# Altium PCB STM32F3_DRV8323RS.PcbDoc (part 1 of 2)
Units mil, origin at the board's own origin, x right, y up, seen from the top; angles counter-clockwise.
Board outline 1929.13 x 1057.48 mil, 4 copper layers (Top Layer, Mid-Layer 1, Mid-Layer 2, Bottom Layer); 100 components, 83 nets, 400 pads, 171 vias.
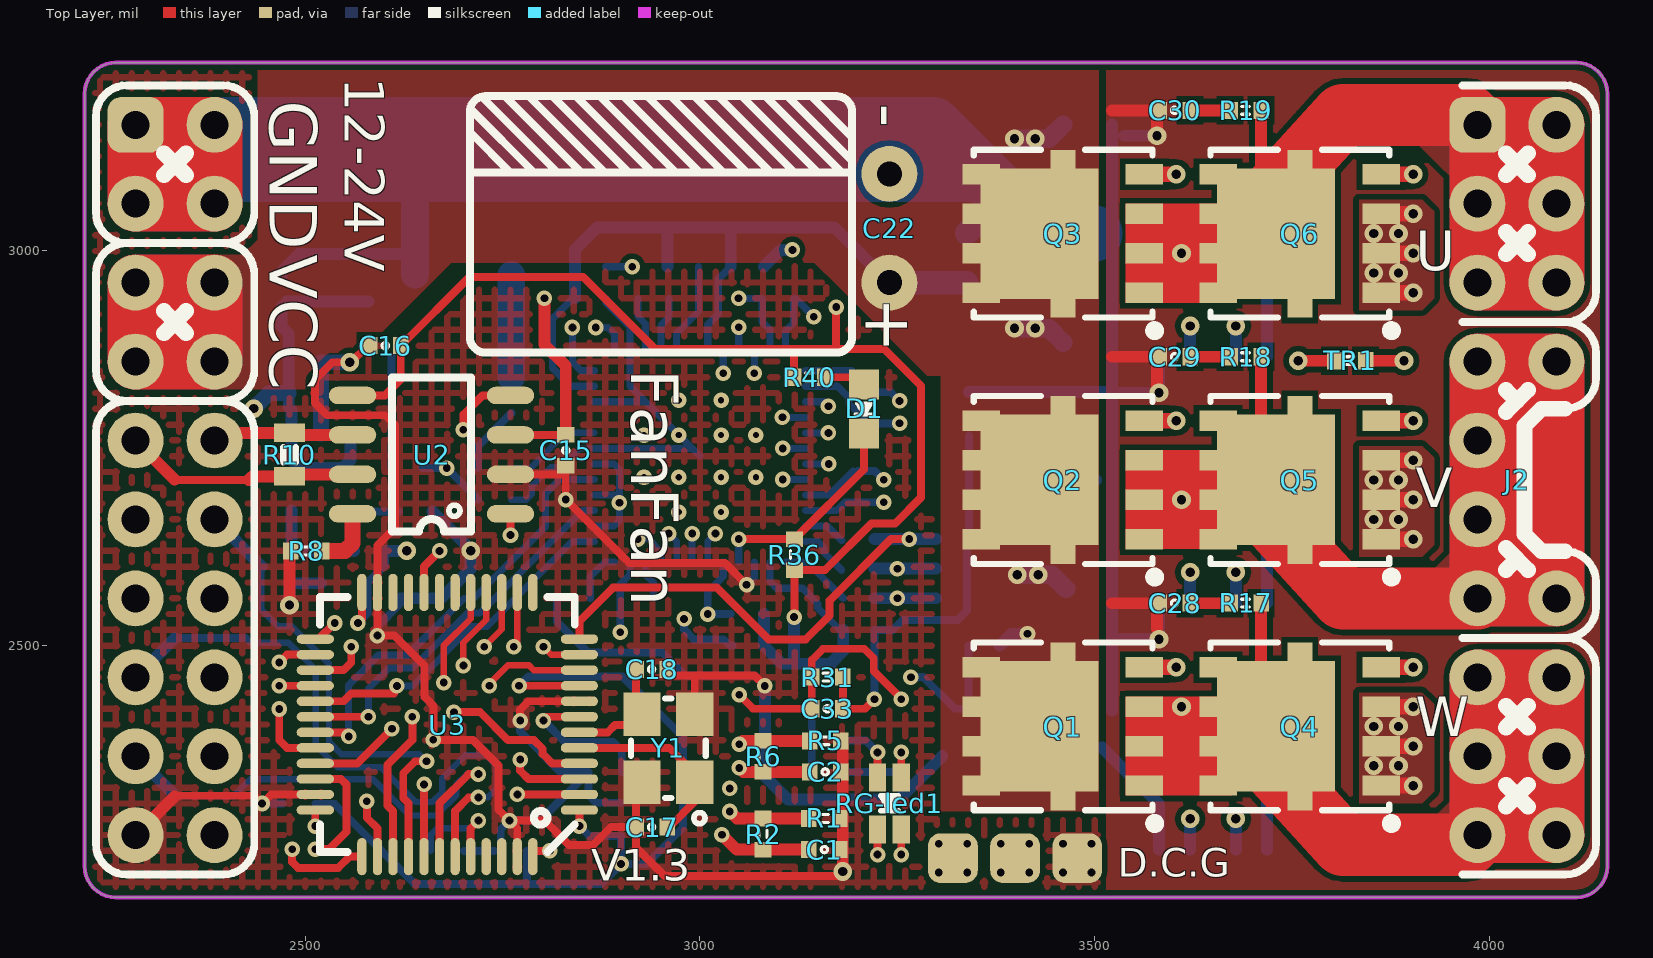
[diagram p0: Top Layer view]
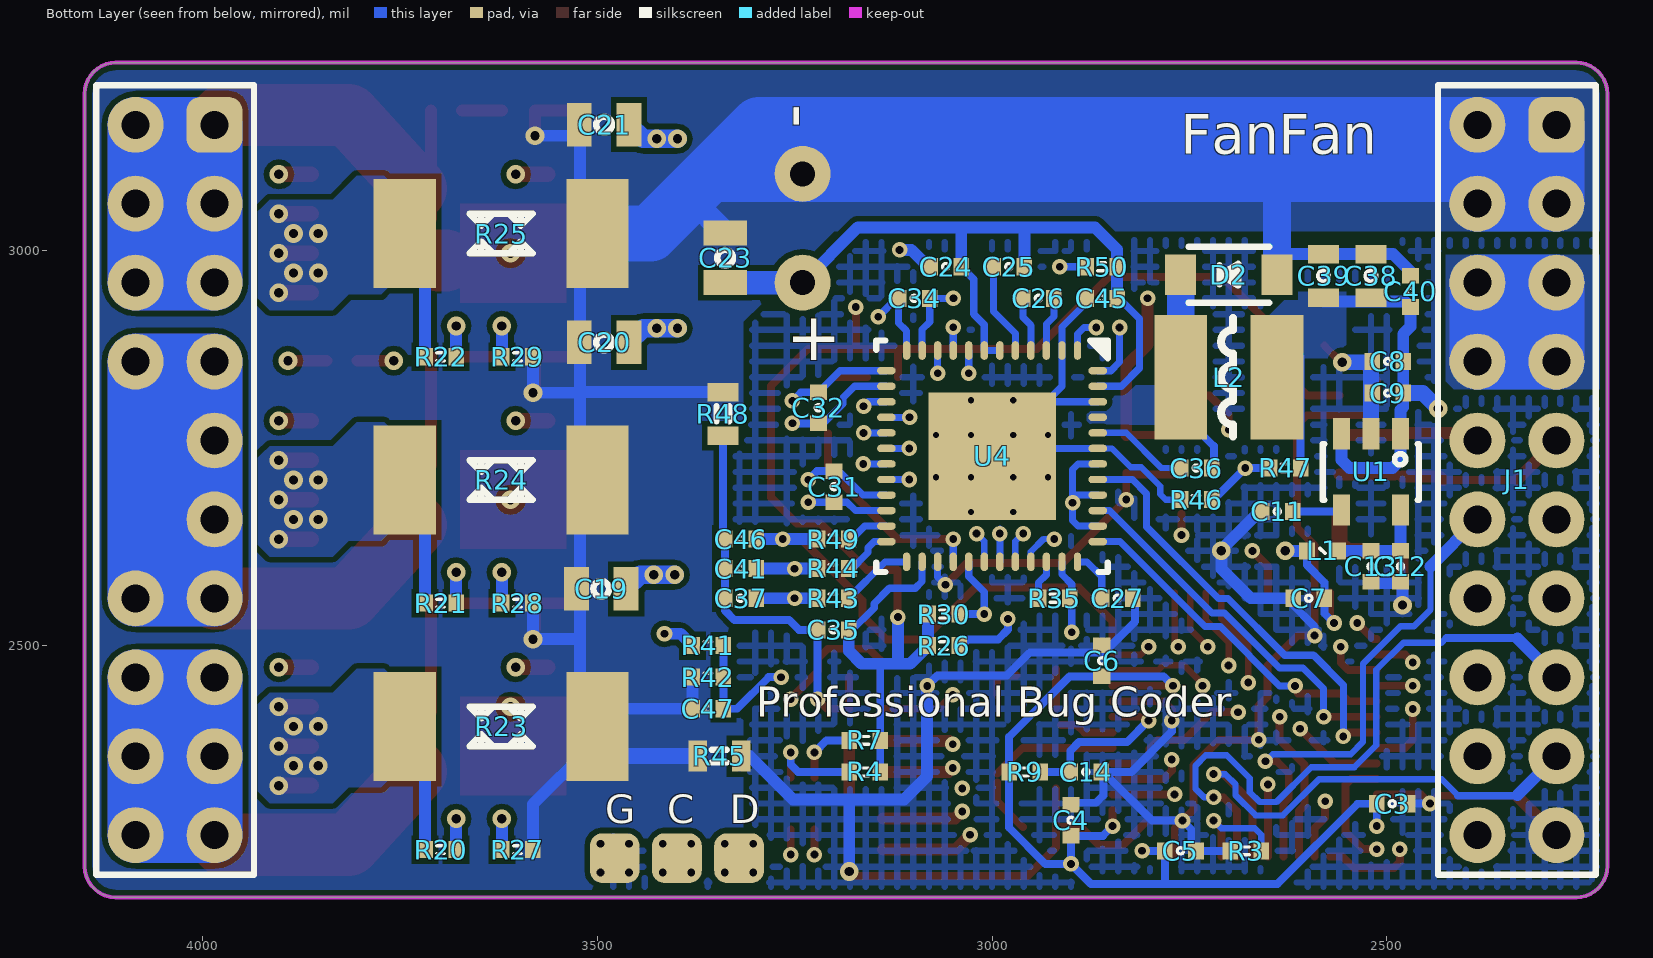
[diagram p1: Bottom Layer view, seen from below]
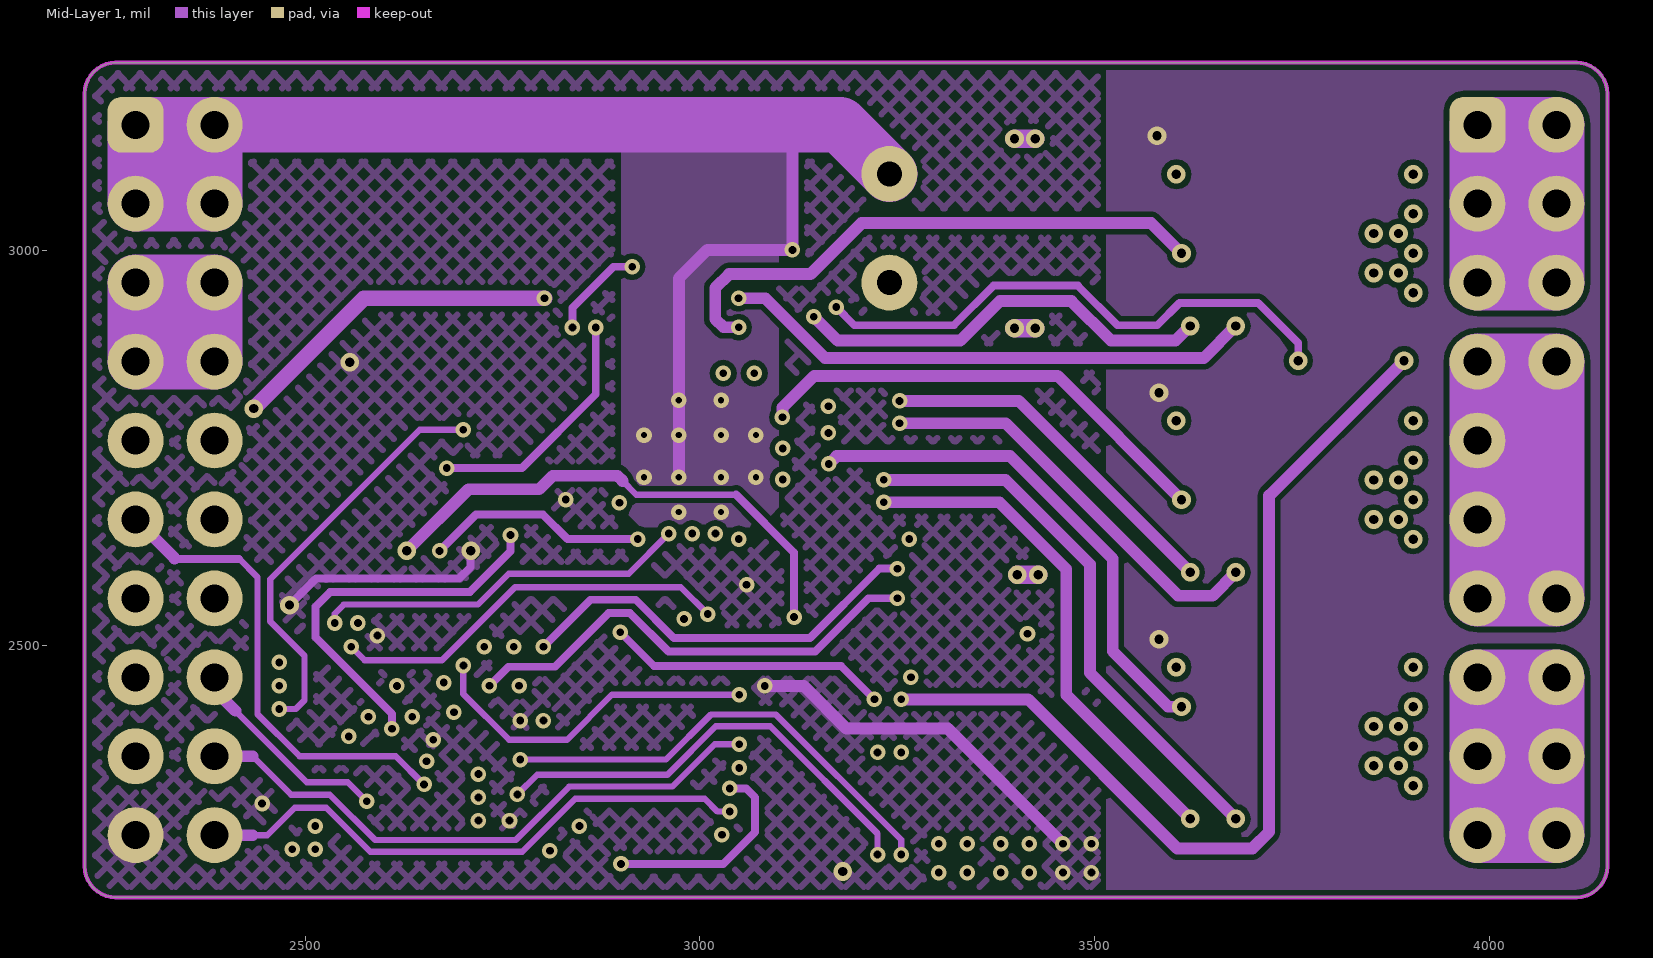
[diagram p2: Mid-Layer 1]
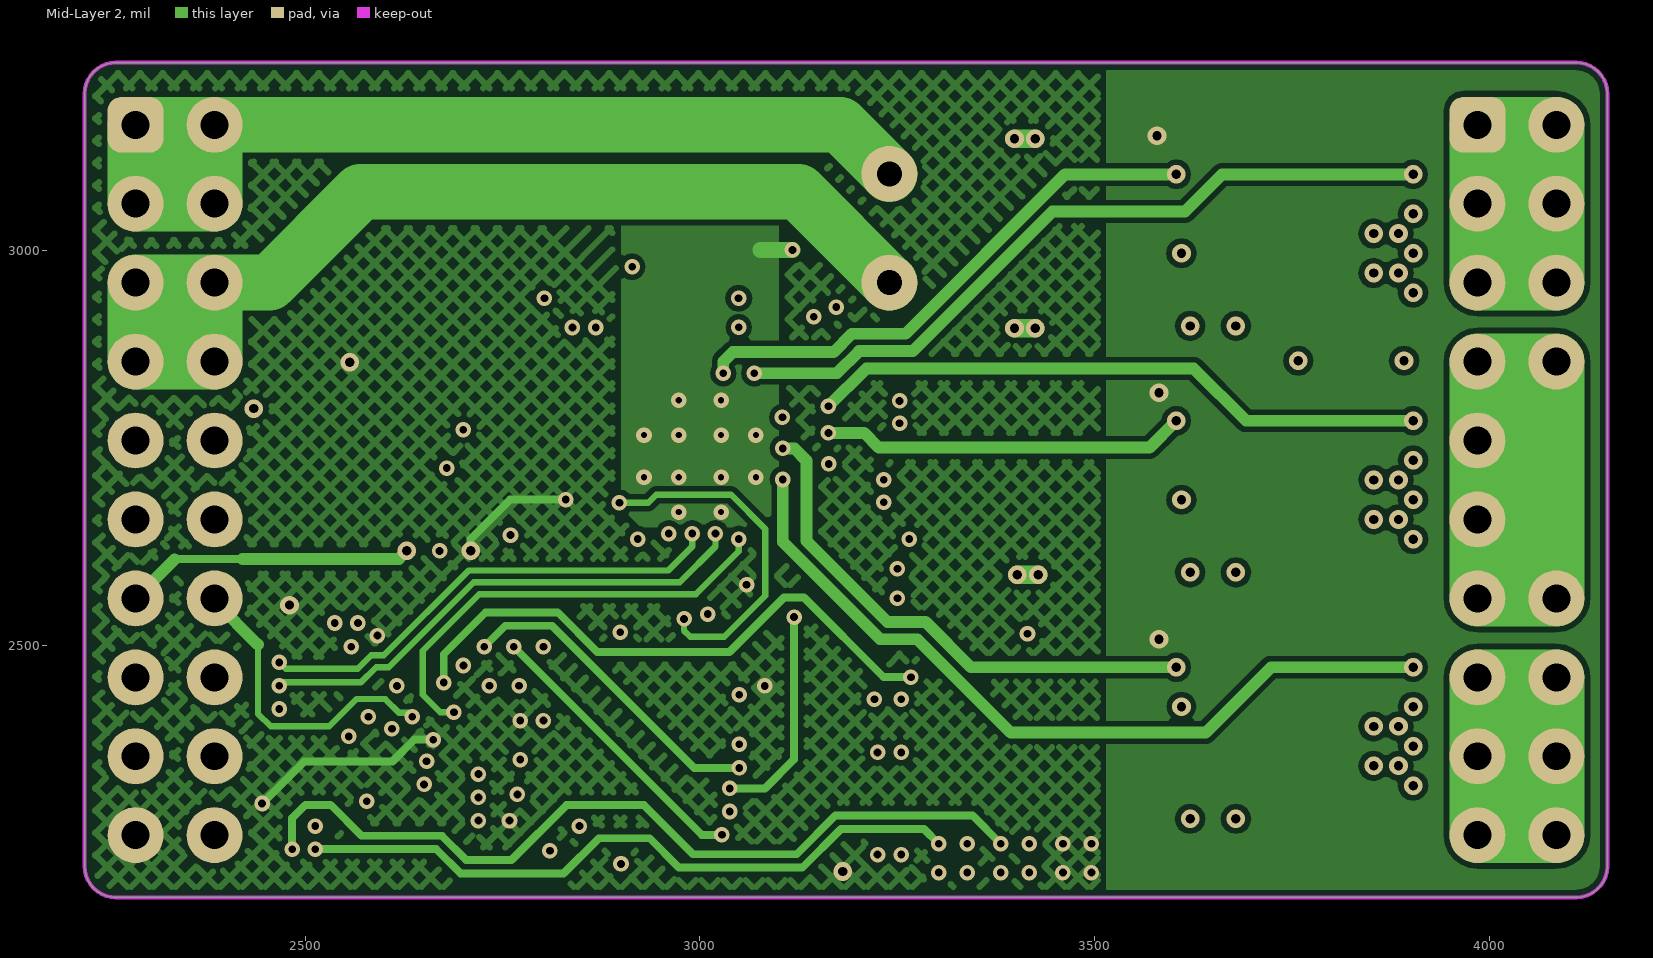
[diagram p3: Mid-Layer 2]

## Layer stack, top to bottom
Top Layer: signal copper 1.4
Dielectric: core 12.6, FR-4, Dk 4.8
Mid-Layer 1: signal copper 1.4
Dielectric: prepreg 12.6, FR-4, Dk 4.8
Mid-Layer 2: signal copper 1.4
Dielectric: core 12.6, FR-4, Dk 4.8
Bottom Layer: signal copper 1.4

## Board outline
2220.47,2220.47 2220.47,3199.21 cw(c2259.84,3199.21) 2259.84,3238.58 4110.24,3238.58 cw(c4110.24,3199.21) 4149.61,3199.21 4149.61,2220.47 cw(c4110.24,2220.47) 4110.24,2181.1 2259.84,2181.1 cw(c2259.84,2220.47)

## Design rules (kind name [scope] priority, off if disabled: settings)
Clearance [All] p1: gap=7
ComponentClearance [All] p1: gap=0 collisioncheckmode=3 verticalgap=0 showdistances=FALSE
HoleToHoleClearance [All] p1: gap=0 allowstackedmicrovias=TRUE
MinimumSolderMaskSliver [All] p1: minsoldermaskwidth=0
PolygonConnect Via [IsVia] p1: connectstyle=Direct reliefconductorwidth=10 reliefentries=4 polygonreliefangle="90 Angle"
PolygonConnect [All] p2: connectstyle=Direct reliefconductorwidth=10 reliefentries=4 polygonreliefangle="90 Angle"
RoutingVias [All] p1: holewidth=28 width=50 viastyle="Through Hole" minholewidth=3.94 minwidth=10.63 maxholewidth=264.22 maxwidth=404.33
SilkToSilkClearance [All] p1: silktosilkclearance=0
SilkscreenOverComponentPads [All] p1: minsilkscreentomaskgap=0
SolderMaskExpansion [All] p1: expansion=4
Width [All] p1: maxlimit=1000 minlimit=8 preferedwidth=10
23 further rules are at their usual default settings.

## Components (designator, comment, footprint, x,y, rotation, side; value= is the part's Value field where it differs from the comment)
C1 "100nF" 0402_C 3157.68,2241.63 r180 top
C2 "100nF" 0402_C 3158.68,2340 r180 top
C3 "100nF/50V" 0402_C 2492.99,2299.68 r180 bottom
C4 "100nF/50V" 0402_C 2900,2278.68 r90 bottom
C5 "100nF/50V" 0402_C 2761.32,2240 r180 bottom
C6 "100nF/50V" 0402_C 2861,2480.68 r90 bottom
C7 "100nF/50V" 0402_C 2598.68,2560 r180 bottom
C8 "2.2uF" 0402_C 2498.68,2860 r0 bottom
C9 "100nF/50V" 0402_C 2498.68,2820 r0 bottom
C11 "10nF/50V" 0402_C 2638.68,2670 r180 bottom
C12 "2.2uF" 0402_C 2482.6,2600.32 r270 bottom
C13 "100nF/50V" 0402_C 2520,2600.32 r270 bottom
C14 "100nF/50V" 0402_C 2881.32,2340 r180 bottom
C15 "100nF/50V" 0402_C 2830,2747.32 r270 top
C16 "100nF/50V" 0402_C 2601.32,2880 r0 top
C17 "20pF" 0402_C 2938.68,2270 r180 top
C18 "20pF" 0402_C 2938.68,2470 r0 top
C19 "1uF/50V" 0805_C 3495.16,2571.89 r0 bottom
C20 "1uF/50V" 0805_C 3491.5,2884.09 r0 bottom
C21 "1uF/50V" 0805_C 3491.5,3160 r0 bottom
C22 "100uF/50V" AEC_8X12.5_B 3240,3028.74 r270 top locked
C23 "4.7uF/50V" 0805_C 3338.16,2991.34 r270 bottom
C24 "100nF/50V" 0402_C 3058.68,2980 r180 bottom
C25 "1uF/50V" 0402_C 2978.68,2980 r180 bottom
C26 "47nF/50V" 0402_C 2941.32,2940 r0 bottom
C27 "1uF/50V" 0402_C 2841.32,2560 r180 bottom
C28 "1nF/50V" 0402_C 3601.32,2553.74 r180 top
C29 "1nF/50V" 0402_C 3601.32,2865.94 r180 top
C30 "1nF/50V" 0402_C 3601.32,3178.15 r180 top
C31 "1nF/50V" 0402_C 3200,2701.32 r90 bottom
C32 "1nF/50V" 0402_C 3220,2801.32 r270 bottom
C33 "100nF/50V" 0402_C 3161.32,2420 r0 top
C34 "1nF/50V" 0402_C 3098.68,2940 r180 bottom
C35 "100nF/50V" 0402_C 3201.32,2520 r180 bottom
C36 "100nF/50V" 0402_C 2741.32,2725 r0 bottom
C37 "4.7nF/50V" 0402_C 3318.68,2560 r0 bottom
C38 "10uF/50V" 0603_C 2520,2968.44 r90 bottom
C39 "10uF/50V" 0603_C 2580,2968.44 r90 bottom
C40 "100nF/50V" 0402_C 2470,2948.68 r270 bottom
C41 "4.7nF/50V" 0402_C 3318.68,2597.5 r0 bottom
C45 "100nF/50V" 0402_C 2861.32,2940 r180 bottom
C46 "4.7nF/50V" 0402_C 3318.68,2635 r0 bottom
C47 "100nF/50V" 0402_C 3360,2420 r180 bottom
D1 "0603_D-CL-0603 URC-RED" 0603_D 3208,2800 r90 top
D2 "SS10100" SOD-123 2700,2970 r180 bottom
J1 "CON-2x10" CON-2x10 2385.04,3159.84 r180 bottom locked
J2 "CON-2x10" CON-2x10-A 4085.04,2259.84 r0 top (schematic designator J1)
L1 "1000R-350mA" 0402_L 2581.32,2620 r0 bottom
L2 "252012_L_15uH-680mA" INDU_4x4x1.8 2700,2840 r90 bottom
Q1 "MOSFET-N" DFN5X6 3460,2397.64 r180 top
Q2 "MOSFET-N" DFN5X6 3460,2709.84 r180 top locked
Q3 "MOSFET-N" DFN5X6 3460,3022.05 r180 top locked
Q4 "MOSFET-N" DFN5X6 3760,2397.64 r180 top locked
Q5 "MOSFET-N" DFN5X6 3760,2709.84 r180 top locked
Q6 "MOSFET-N" DFN5X6 3760,3022.05 r180 top locked
R1 "100K" 0402_R 3157.68,2281 r180 top
R2 "1K" 0402_R 3080,2261.32 r90 top
R3 "10K" 0402_R 2678.68,2240 r180 bottom
R4 "680R" 0402_R 3161.32,2340 r180 bottom
R5 "100K" 0402_R 3158.68,2379.37 r180 top
R6 "1K" 0402_R 3080,2359.68 r90 top
R7 "1K" 0402_R 3161.32,2380 r180 bottom
R8 "100R" 0402_R 2501.32,2620 r180 top
R9 "10K" 0402_R 2958.68,2340 r180 bottom
R10 "120R" 0603_R 2480,2742 r90 top
R17 "10R" 0402_R 3691.32,2553.74 r180 top
R18 "10R" 0402_R 3691.32,2865.94 r180 top
R19 "10R" 0402_R 3691.32,3178.15 r180 top
R20 "100R" 0402_R 3698.69,2241.54 r180 bottom
R21 "100R" 0402_R 3698.69,2553.74 r180 bottom
R22 "100R" 0402_R 3698.69,2865.95 r180 bottom
R23 "0.001R" 2512_R 3622.05,2397.64 r180 bottom locked
R24 "0.001R" 2512_R 3622.05,2709.84 r180 bottom locked
R25 "0.001R" 2512_R 3622.05,3022.05 r180 bottom locked
R26 "1K" 0402_R 3061.32,2500 r0 bottom
R27 "100R" 0402_R 3601.32,2241.54 r0 bottom
R28 "100R" 0402_R 3601.32,2553.74 r0 bottom
R29 "100R" 0402_R 3601.32,2865.95 r0 bottom
R30 "10K" 0402_R 3061.32,2540 r0 bottom
R31 "3K" 0402_R 3161.32,2460 r180 top
R35 "NC" 0402_R 2921.32,2560 r0 bottom
R36 "10K" 0402_R 3119.72,2615.34 r270 top
R40 "10K" 0402_R 3138.68,2840 r180 top
R41 "32.4K" 0402_R 3360,2500 r180 bottom
R42 "4.32K" 0402_R 3360,2460 r0 bottom
R43 "100R" 0402_R 3201.32,2560 r180 bottom
R44 "100R" 0402_R 3201.32,2597.5 r180 bottom
R45 "0R" 0603_R 3345.44,2360 r0 bottom
R46 "10K" 0402_R 2741.32,2685 r180 bottom
R47 "56K" 0402_R 2628.68,2725 r180 bottom
R48 "0R" 0603_R 3341,2793.56 r90 bottom
R49 "100R" 0402_R 3201.32,2635 r180 bottom
R50 "NC" 0402_R 2861.32,2980 r0 bottom
RG-led1 "Dual LED" 0603_Dx2 3240,2300 r0 top
TR1 "10K" 0402_R 3823.68,2860.95 r180 top
U1 "XC6209F332MR-G" SOT23-5 2520,2720 r0 bottom
U2 "1042" SOP-8 2660,2740 r90 top
U3 "STM32F103C8T6" LQFP-48 2680,2400 r90 top locked
U4 "DRV8323RSRGZR" RGZ0048B 3000,2740 r270 bottom locked (schematic designator U1)
Y1 "12MHz-12PF" XTAL_SMD_3.2X2.5_4P 2960,2370 r90 top

## Footprints (in the part's own frame and the unit in brackets; to place one, negate y for a bottom-side part, rotate by r counter-clockwise, add the part's x,y. Pads: shape width x height; smd on the part's side, far side on the other; paste and mask are expansions set on the pad)
0402_C [mm]
  rect 0.5x0.55 smd: 1(-0.5,0) 2(0.5,0)
  silkscreen extent -0.1,-0.1 0.1,0.1
0402_L [mm]
  rect 0.5x0.55 smd: 1(-0.5,0) 2(0.5,0)
  silkscreen extent -0.08,-0.08 0.08,0.08
0402_R [mm]
  rect 0.5x0.55 smd: 1(-0.5,0) 2(0.5,0)
  silkscreen extent -0.13,-0.13 0.13,0.13
0603_C [mm]
  rect 0.6x1 smd: 1(-0.7,0) 2(0.7,0)
  silkscreen extent -0.18,-0.18 0.18,0.18
0603_D [mil]
  rect 38x38 smd: 1(31,0) 2(-31,0)
  silkscreen extent -7,-11 7,11
0603_Dx2 [mil]
  rect 22x35 smd: 1(-15,33) 2(-15,-33) 3(15,33) 4(15,-33)
  silkscreen extent -11,-9 11,10
0603_R [mm]
  rect 0.6x1 smd: 1(-0.7,0) 2(0.7,0)
  silkscreen extent -0.24,-0.2 0.24,0.2
0805_C [mm]
  rect 0.8x1.4 smd: 1(-0.8,0) 2(0.8,0)
  silkscreen extent -0.25,-0.25 0.25,0.25
2512_R [mm]
  rect 2x3.5 smd: 1(-3.1,0) 2(3.1,0)
  silkscreen extent -1.02,-0.64 1.02,0.64
AEC_8X12.5_B [mm]
  round 1.8 hole 0.8: 1(1.75,0) 2(-1.75,0)
  silkscreen extent -4.25,-13.5 4,-1.2
CON-2x10 [mm]
  rrect50% 1.8x1.8 hole 0.9: 1(2.54,0)
  round 1.8 hole 0.9: 2(0,0) 3(2.54,-2.54) 4(0,-2.54) 5(2.54,-5.08) 6(0,-5.08) 7(2.54,-7.62) 8(0,-7.62) 9(2.54,-10.16) 10(0,-10.16) 11(2.54,-12.7) 12(0,-12.7) 13(2.54,-15.24) 14(0,-15.24) 15(2.54,-17.78) 16(0,-17.78) 17(2.54,-20.32) 18(0,-20.32) 19(2.54,-22.86) 20(0,-22.86)
  silkscreen extent -1.27,-24.13 3.81,1.27
CON-2x10-A [mm]
  rrect50% 1.8x1.8 hole 0.9: 1(-2.54,22.86)
  round 1.8 hole 0.9: 2(0,22.86) 3(-2.54,20.32) 4(0,20.32) 5(-2.54,17.78) 6(0,17.78) 7(-2.54,15.24) 8(0,15.24) 9(-2.54,12.7) 11(-2.54,10.16) 13(-2.54,7.62) 14(0,7.62) 15(-2.54,5.08) 16(0,5.08) 17(-2.54,2.54) 18(0,2.54) 19(-2.54,0) 20(0,0)
DFN5X6 [mm]
  rect 1.2x0.65 smd: 1(-2.616,-1.905) 2(2.629,1.905) 2(2.629,-0.635) 2(2.629,0.635) 2(2.629,-1.905) 3(-2.616,1.905) 3(-2.616,-0.635) 3(-2.616,0.635)
  rect 0.8x1 smd: 2(0,2.205) 2(0,-2.195)
  rect 3.8x4.2 smd: 2(0.762,0)
  silkscreen extent -3.1,-2.7 2.88,3.28
INDU_4x4x1.8 [mm]
  rect 4x1.7 smd: 1(0,1.55) 2(0,-1.55)
  silkscreen extent -1.91,-0.13 1.91,0.25
LQFP-48 [mm]
  oval 0.3x1.2 smd: 1(-2.75,-4.25) 2(-2.25,-4.25) 3(-1.75,-4.25) 4(-1.25,-4.25) 5(-0.75,-4.25) 6(-0.25,-4.25) 7(0.25,-4.25) 8(0.75,-4.25) 9(1.25,-4.25) 10(1.75,-4.25) 11(2.25,-4.25) 12(2.75,-4.25) 25(2.75,4.25) 26(2.25,4.25) 27(1.75,4.25) 28(1.25,4.25) 29(0.75,4.25) 30(0.25,4.25) 31(-0.25,4.25) 32(-0.75,4.25) 33(-1.25,4.25) 34(-1.75,4.25) 35(-2.25,4.25) 36(-2.75,4.25)
  oval 1.2x0.3 smd: 13(4.25,-2.75) 14(4.25,-2.25) 15(4.25,-1.75) 16(4.25,-1.25) 17(4.25,-0.75) 18(4.25,-0.25) 19(4.25,0.25) 20(4.25,0.75) 21(4.25,1.25) 22(4.25,1.75) 23(4.25,2.25) 24(4.25,2.75) 37(-4.25,2.75) 38(-4.25,2.25) 39(-4.25,1.75) 40(-4.25,1.25) 41(-4.25,0.75) 42(-4.25,0.25) 43(-4.25,-0.25) 44(-4.25,-0.75) 45(-4.25,-1.25) 46(-4.25,-1.75) 47(-4.25,-2.25) 48(-4.25,-2.75)
  silkscreen extent -4.1,-4.1 4.1,4.1
RGZ0048B [mm] "QFN, 48-Leads, Body 7x7mm, Pitch 0.5mm, Thermal Pad 5.15x5.15mm, TI Recommended"
  oval 0.6x0.24 smd: 1(-3.4,2.75) 2(-3.4,2.25) 3(-3.4,1.75) 4(-3.4,1.25) 5(-3.4,0.75) 6(-3.4,0.25) 7(-3.4,-0.25) 8(-3.4,-0.75) 9(-3.4,-1.25) 10(-3.4,-1.75) 11(-3.4,-2.25) 12(-3.4,-2.75) 25(3.4,-2.75) 26(3.4,-2.25) 27(3.4,-1.75) 28(3.4,-1.25) 29(3.4,-0.75) 30(3.4,-0.25) 31(3.4,0.25) 32(3.4,0.75) 33(3.4,1.25) 34(3.4,1.75) 35(3.4,2.25) 36(3.4,2.75)
  oval 0.24x0.6 smd: 13(-2.75,-3.4) 14(-2.25,-3.4) 15(-1.75,-3.4) 16(-1.25,-3.4) 17(-0.75,-3.4) 18(-0.25,-3.4) 19(0.25,-3.4) 20(0.75,-3.4) 21(1.25,-3.4) 22(1.75,-3.4) 23(2.25,-3.4) 24(2.75,-3.4) 37(2.75,3.4) 38(2.25,3.4) 39(1.75,3.4) 40(1.25,3.4) 41(0.75,3.4) 42(0.25,3.4) 43(-0.25,3.4) 44(-0.75,3.4) 45(-1.25,3.4) 46(-1.75,3.4) 47(-2.25,3.4) 48(-2.75,3.4)
  rect 4.1x4.1 smd paste-2.575: 49(0,0)
  silkscreen extent -3.72,-3.72 3.72,3.72, body extent -3.57,-3.58 3.58,3.57, height 1.01
SOD-123 [mm]
  rect 1x1.3 smd: 1(1.55,0) 2(-1.55,0)
  silkscreen extent -1.3,-0.9 1.3,0.9
SOP-8 [mil]
  oval 22x60 smd: 1(-73,-100) 2(-23,-100) 3(27,-100) 4(77,-100) 5(77,100) 6(27,100) 7(-23,100) 8(-73,100)
  silkscreen extent -96,-50 100,50
SOT23-5 [mm]
  rect 0.55x1 smd: 1(-0.95,-1.23) 2(0,-1.23) 3(0.95,-1.23) 4(0.95,1.23) 5(-0.95,1.23)
  silkscreen extent -1.55,-0.9 1.55,0.9
XTAL_SMD_3.2X2.5_4P [mm]
  rect 1.4x1.2 smd: 1(-1.1,-0.85) 2(1.1,-0.85) 3(1.1,0.85) 4(-1.1,0.85)
  silkscreen extent -2.43,-1.2 1.6,1.2

## Part data
C1 C2 C3 C4 C5 C6 C7 C8 C9 C11 C12 C13 C14 C15 C16 C17 C18 C19 C20 C21 C23 C24 C25 C26 C27 C28 C29 C30 C31 C32 C33 C34 C35 C36 C37 C38 C39 C40 C41 C45 C46 C47: library part Cap, "Capacitor"
C22: library part "Cap Pol", "Polarized Capacitor (Radial)"
D1: library part LED, "LED"
D2: library part Diode, "DIODE SWITCHING 75V 0.15A SOD523"
L1 L2: library part Inductor, "Inductor"
Q1 Q2 Q3 Q4 Q5 Q6: "N-Channel MOSFET"
R1 R2 R5 R6: library part Res, "Resistor"
R3 R4 R7 R8 R9 R10 R17 R18 R19 R20 R21 R22 R23 R24 R25 R26 R27 R28 R29 R30 R31 R35 R36 R40 R41 R42 R43 R44 R45 R46 R47 R48 R49 R50: library part Res2, "Resistor"
TR1: library part "Res Adj2", "Variable Resistor"
U1: library part XC6228D332VR-G
U2: library part MAX3051
U3: library part STM32F103CBT6
U4: "60-V Three-Phase Smart Gate Driver, RGZ0048B"
Y1: library part XTAL-4P, "XTAL-4P"

## Free pads (board coordinates)
  rrect50% 62.99x62.99 smd: 0(3320.48,2230.8) 0(3399.22,2230.8) 0(3477.96,2230.8)
  rrect50% 62.99x62.99 smd far side: 0(3320.48,2230.8) 0(3399.22,2230.8) 0(3477.96,2230.8)

## Via types
v1: diameter 19.68, hole 9.84, Top Layer to Bottom Layer, tented both sides, 106 vias
v2: diameter 23.62, hole 11.81, Top Layer to Bottom Layer, tented both sides, 53 vias
v3: diameter 19.68, hole 7.87, Top Layer to Bottom Layer, 12 vias

## Nets (pads, with @x,y where several pads share a name; then routed paths per layer and width w, separated by ;. In a path a pad name is that pad's centre, name@x,y a point inside that pad or via, vN(x,y) a via of type N, cw(c..) or ccw(c..) an arc to the next point about the centre after c; other vN are vias at no path point)
A_AND_1: Q6.3 R22.1 R25.1 | length 256.5
  Top Layer w20: Q6.3@3863,2947.05 v2(3903.49,2947.05) ; Q6.3@3863,2997.05 v2(3903.49,2997.05) ; Q6.3@3863,3047.05 v2(3903.49,3047.05)
  Bottom Layer w15: R22.1@3718.37,2865.95 R25.1@3718.37,3001
  other v2: 3853.49,2972.05 3885,2972.05 3853.49,3022.05 3885,3022.05
ADC_0: C37.1 R43.1 U3.10 | length 807.3
  Top Layer w8: v1@2733.32,2451.44 2756.82,2474.94 2783.38,2474.94 2789.42,2468.9 U3.10@2847.32,2468.9
  Mid-Layer 1 w10: v1(2733.32,2449.21) 2757.38,2473.27 2816.27,2473.27 2884.12,2541.12 2911.5,2541.12 2960.2,2492.41 3146.07,2492.41 3213.65,2560 v1(3250.19,2560)
  Bottom Layer w15: R43.1@3221,2560 C37.1@3299,2560
ADC_1: C41.1 R44.1 U3.11 | length 657.3
  Top Layer w8: v1(2801.69,2498.43) 2811.53,2488.58 U3.11@2847.32,2488.58
  Mid-Layer 1 w10: v1(2801.69,2498.43) 2861.38,2558.12 2918.54,2558.12 2966.94,2509.72 3139.33,2509.72 3227.11,2597.5 v1(3250.19,2597.5)
  Bottom Layer w15: R44.1@3221,2597.5 C41.1@3299,2597.5
ADC_2: C46.1 R49.1 U3.12 | length 627
  Top Layer w10: U3.12@2847.32,2508.27 2847.32,2530.84 2890.02,2573.54 3021.36,2573.54 3086.9,2508 3134,2508 3164,2538 3164,2557 3242,2635 v1(3265.21,2635)
  Bottom Layer w15: R49.1@3221,2635 C46.1@3299,2635
AGND: C33.2 C35.1 C37.2 C41.2 C46.2 R31.1 R35.1 R48.1 U4.35 | length 971
  Top Layer w10: R31.1@3181,2460 C33.2@3181,2420 3209.04,2420 v1(3221,2431.96)
  Mid-Layer 1 w10: v1(2899,2516.99) 2941.99,2474 3178.96,2474 v1(3221,2431.96)
  Bottom Layer w9: v1(2899,2516.99) 2899,2577.81 2911.42,2590.23 U4.35@2911.42,2606.14
  Bottom Layer w10: v1(3221,2431.96) C35.1@3221,2520 3244.5,2520 3257.04,2532.54 3326.54,2532.54 3338.37,2544.37 C37.2@3338.37,2560 C46.2@3338.37,2635 ; C46.2@3341,2637.63 R48.1@3341,2766
B_AND_1: Q5.3 R21.1 R24.1 | length 256.5
  Top Layer w20: Q5.3@3863,2634.84 v2(3903.49,2634.84) ; Q5.3@3863,2684.84 v2(3903.49,2684.84) ; Q5.3@3863,2734.84 v2(3903.49,2734.84)
  Bottom Layer w15: R21.1@3718.37,2553.74 R24.1@3718.37,2688.8
  other v2: 3853.49,2659.84 3885,2659.84 3853.49,2709.84 3885,2709.84
C_AND_1: Q4.3 R20.1 R23.1 | length 256.5
  Top Layer w20: Q4.3@3863,2322.64 v2(3903.49,2322.64) ; Q4.3@3863,2372.64 v2(3903.49,2372.64) ; Q4.3@3863,2422.64 v2(3903.49,2422.64)
  Bottom Layer w15: R20.1@3718.37,2241.54 R23.1@3718.37,2376.59
  other v2: 3853.49,2347.64 3885,2347.64 3853.49,2397.64 3885,2397.64
CAN_H: J1.9 R10.1 U2.7 | length 287.3
  Top Layer w10: 2334.46,2709.84 2428.4,2709.84
  Top Layer w15: J1.9@2285.04,2759.84 2334.46,2710.43 ; 2428.4,2709.84 2433,2714.44 R10.1@2480,2714.44 ; R10.1@2490,2717 U2.7@2560,2717
CAN_L: J1.10 R10.2 U2.6 | length 177.9
  Top Layer w15: J1.10@2385.04,2759.84 J1.10@2398.2,2773 ; J1.10@2394.76,2769.56 R10.2@2480,2769.56 ; R10.2@2486,2767 U2.6@2560,2767
CAN_RX: U2.4 U3.32 | length 708.9
  Top Layer w10: v1(2467.04,2419.69) 2467.04,2380.31 2476.89,2370.47 U3.32@2512.68,2370.47 ; v1(2700.17,2773.59) 2700.17,2792.58 2724.59,2817 U2.4@2760,2817
  Mid-Layer 1 w8: v1(2467.04,2419.69) 2487.93,2419.69 2499.03,2430.79 2499.03,2487.22 2455.63,2530.63 2455.63,2584.11 2645.11,2773.59 v1(2700.17,2773.59)
CAN_TX: U2.1 U3.33 | length 633.5
  Top Layer w10: U3.33@2512.68,2350.79 2565.84,2350.79 v1(2609.84,2394.79) ; v1(2760,2640) U2.1@2760,2667
  Mid-Layer 1 w10: v1(2609.84,2394.79) 2609.84,2413.59 2513.16,2510.27 2513.16,2549.61 2531.57,2568.01 2708.45,2568.01 2760,2619.57 v1(2760,2640)
DGND: C1.1 C2.1 C3.2 C4.2 C5.2 C6.2 C7.1 C8.2 C9.2 C11.1 C12.2 C13.2 C14.2 C15.2 C16.1 C17.2 C18.2 C27.2 J1.19 pad.0@3477.96,2230.8 R1.1 R3.1 R5.1 R8.2 R45.1 U1.2 U2.2 U3.8 U3.23 U3.35 U3.47 U4.27 Y1.2 Y1.4 | length 5361
  Top Layer w10: 2334.46,2309.85 2435.49,2309.85 v1(2445.33,2300) 2456.75,2311.42 U3.35@2512.68,2311.42 ; C16.1@2579,2880 2558,2859 v2(2556.22,2859) 2534.6,2859 2512.26,2836.66 2512.26,2807.26 2527.63,2791.89 2601.19,2791.89 2613.59,2779.49 2613.59,2649.23 2591.42,2627.05 U3.23@2591.42,2567.32 v1(2591.42,2512.7) 2612.71,2512.7 2650.95,2474.46 2650.95,2435.06 2662.55,2423.45 2662.55,2380.39 2712.58,2380.39 2744.86,2348.12 2744.86,2292.19 v1(2758.74,2278.31) ; U2.2@2760,2717 2828,2717 ; U3.47@2768.58,2232.68 2768.58,2268.47 v1(2758.74,2278.31) ; v1(2772.24,2405) 2772.24,2419.06 2782.71,2429.53 U3.8@2847.32,2429.53 ; C15.2@2830,2719 v1(2830,2685.09) 2910.38,2604.71 3031.61,2604.71 v1(3059.06,2577.26) ; Y1.4@2919,2319.16 C17.2@2919,2270 ; 2968.96,2462.04 2993.46,2462.04 ; Y1.2@2993.46,2437.54 2993.46,2462.04 ; v1(3082.24,2449.01) 3069.2,2462.04 2993.46,2462.04 ; v2@3175.37,2208.2 2955.01,2208.2 2919,2244.21 C17.2@2919,2270 ; v1(2758.74,2278.31) 2803.32,2278.31 2834.22,2247.42 2864.42,2247.42 2887,2270 C17.2@2919,2270
  Top Layer w15: J1.19@2285.04,2259.84 2334.46,2309.26 ; v2(2480,2551.36) R8.2@2480,2620 ; v2(3181,2213.84) R5.1@3181,2380
  Mid-Layer 1 w10: v2(2480,2551.36) 2513.66,2585.01 2694.83,2585.01 2709.53,2599.71 v2(2709.53,2620)
  Mid-Layer 1 w15: v1(3082.24,2449.01) 3131.59,2449.01 3185.6,2395 3314.02,2395 v1(3459.89,2249.13)
  Mid-Layer 2 w10: v1(2445.33,2300) 2498.59,2353.26 2610.52,2353.26 2638.14,2380.88 v1(2662.06,2380.88) ; v2(2709.53,2620) 2709.53,2635.04 2759.58,2685.09 v1(2830,2685.09)
  Bottom Layer w9: v1(3059.06,2577.26) 3068.9,2587.1 U4.27@3068.9,2606.14
  Bottom Layer w10: v1(2445.33,2300) C3.2@2471,2300 ; v1(2591.42,2512.7) 2591.42,2524.21 C7.1@2621,2553.8 ; R3.1@2701,2240 C5.2@2739,2240 ; C5.2@2747.66,2242.49 2747.66,2267.23 v1(2758.74,2278.31) 2797.31,2278.31 C14.2@2859,2340 ; v1(2772.24,2405) 2772.24,2391.23 2823.47,2340 C14.2@2859,2340 ; C27.2@2819,2560 2819,2530.4 2858.16,2491.24 2952.13,2491.24 2981.3,2462.07 3069.17,2462.07 v1(3082.24,2449.01) ; C4.2@2900,2301 2868.37,2301 2859,2310.37 C14.2@2859,2340
  Bottom Layer w15: v2(2480,2551.36) 2480,2579 C13.2@2520,2579 ; C7.1@2621,2560 2672.25,2560 2709.53,2597.28 v2(2709.53,2620) ; C11.1@2661,2670 v2@2710.26,2620.74 ; v1(3082.24,2449.01) 3082.24,2334.41 3111.64,2305 3252,2305 R45.1@3307,2360 ; v2(3181,2213.84) 3181,2303.13
  Bottom Layer w20: U1.2@2520,2768.43 2520,2859 v2(2556.22,2859)
  other v1: 3459.89,2212.47 3496.03,2212.47 3496.03,2249.13
DRV_CLK: U3.26 U4.31 | length 698
  Top Layer w10: v1(2467.04,2478.74) 2476.89,2488.58 U3.26@2512.68,2488.58
  Mid-Layer 2 w8: v1(2467.04,2478.74) 2475.14,2470.65 2566.59,2470.65 2583.63,2487.69 2599.56,2487.69 2707.07,2595.2 2959.78,2595.2 2990.16,2625.58 v1(2990.16,2642)
  Bottom Layer w9: U4.31@2990.16,2606.14 v1@2990.16,2647.41
DRV_CS: U3.25 U4.32 | length 550.2
  Top Layer w10: U3.25@2512.68,2508.27 2516.89,2508.27 v1(2537.26,2528.64)
  Mid-Layer 1 w8: v1(2537.26,2528.64) 2537.26,2540.52 2548.75,2552.01 2718.63,2552.01 2757.62,2591 2909.63,2591 v1(2960.63,2642)
  Bottom Layer w8: v1(2960.63,2642) 2970.47,2632.16 U4.32@2970.47,2606.14
DRV_SDI: U3.28 U4.30 | length 727.7
  Top Layer w10: v1(2467.04,2449.21) U3.28@2512.68,2449.21
  Mid-Layer 2 w8: v1(2467.04,2449.21) 2471.23,2453.4 2570.56,2453.4 2589.85,2472.69 2605.77,2472.69 2713.28,2580.2 2974.28,2580.2 3019.69,2625.61 v1(3019.69,2642)
  Bottom Layer w8: U4.30@3009.84,2606.14 3009.84,2632.16 v1(3019.69,2642)
DRV_SDO: R30.1 U3.27 U4.29 | length 683.7
  Top Layer w10: U3.27@2512.68,2468.9 2548.47,2468.9 2558.31,2478.74 v1(2558.31,2498.43)
  Mid-Layer 1 w8: v1(2558.31,2498.43) 2575.12,2481.62 2673.16,2481.62 2765.66,2574.12 2975.82,2574.12 v1(3009.94,2540)
  Bottom Layer w9: v1(3009.94,2540) 3009.94,2567.94 3029.53,2587.53 U4.29@3029.53,2606.14
  Bottom Layer w10: v1(3009.94,2540) R30.1@3039,2540
DVDD1: C27.1 U4.36 | length 65.9
  Bottom Layer w9: C27.1@2861,2560 2861,2587.38 2879.76,2606.14 U4.36@2891.73,2606.14
EN_GATE: U3.20 U4.33 | length 393
  Top Layer w10: U3.20@2650.47,2567.32 2650.47,2600.32 v1(2670.16,2620)
  Mid-Layer 1 w10: v1(2670.16,2620) 2716.3,2666.15 2801.01,2666.15 2832.14,2635.02 v1(2921.26,2635.02)
  Bottom Layer w8: v1(2921.26,2635.02) 2934.88,2635.02 2950.79,2619.12 U4.33@2950.79,2606.14
FAULT_1: D1.2 R36.1 U3.4 U4.28 | length 1031.8
  Top Layer w10: v1(2688.31,2415.68) 2721.55,2415.68 2756.94,2380.29 2789.67,2380.29 2800.78,2369.18 2800.78,2362.93 2812.92,2350.79 U3.4@2847.32,2350.79 ; v1(3049.21,2635.02) R36.1@3119.72,2635.02 3208,2723.3 D1.2@3208,2769
  Mid-Layer 2 w8: v1(2688.31,2415.68) 2670.94,2415.68 2648.97,2437.66 2648.97,2493.66 2720.51,2565.2 2994.93,2565.2 3049.21,2619.48 v1(3049.21,2635.02)
  Bottom Layer w9: U4.28@3049.21,2606.14 v1(3049.21,2635.02)
FB1: R46.2 R47.1 U4.1 | length 447.5
  Mid-Layer 1 w10: v1(2679.18,2725) 2774.59,2725 2868,2818.41 v1(2868,2903.02)
  Bottom Layer w9: v1(2868,2903.02) 2883.36,2903.02 2891.73,2894.65 U4.1@2891.73,2873.86
  Bottom Layer w10: R47.1@2648.37,2725 v1(2679.18,2725) R46.2@2719.18,2685
GHA_1: Q3.1 U4.8 | length 756.4
  Top Layer w20: Q3.1@3563,3097.05 v2(3603.49,3097.05)
  Mid-Layer 2 w15: v1(3029.53,2844.98) 3029.53,2859.84 3041.61,2871.92 3169.28,2871.92 3192.42,2895.05 3260.5,2895.05 3462.49,3097.05 v2(3603.49,3097.05)
  Bottom Layer w9: v1(3029.53,2844.98) U4.8@3029.53,2873.86
GHB_1: Q2.1 U4.17 | length 531.9
  Top Layer w20: Q2.1@3563,2784.84 v2(3603.49,2784.84)
  Mid-Layer 2 w15: v1(3162.74,2769.53) 3207.96,2769.53 3226.61,2750.88 3569.53,2750.88 v2(3603.49,2784.84)
  Bottom Layer w9: U4.17@3133.86,2769.53 v1(3162.74,2769.53)
GHC_1: Q1.1 U4.18 | length 742.4
  Top Layer w20: Q1.1@3563,2472.64 v2(3603.49,2472.64)
  Mid-Layer 2 w15: v1(3104.98,2749.84) 3119.62,2749.84 3134.95,2734.52 3134.95,2632.59 3237.41,2530.13 3285.76,2530.13 3343.25,2472.64 v2(3603.49,2472.64)
  Bottom Layer w9: v1(3104.98,2749.84) U4.18@3133.86,2749.84
GLA_1: Q6.1 U4.10 | length 1008.4
  Top Layer w20: Q6.1@3863,3097.05 v2(3903.49,3097.05)
  Mid-Layer 2 w15: v1(3068.9,2844.98) 3173.45,2844.98 3201.53,2873.05 3269.61,2873.05 3446.39,3049.83 3614.35,3049.83 3661.57,3097.05 v2(3903.49,3097.05)
  Bottom Layer w9: v1(3068.9,2844.98) U4.10@3068.9,2873.86
GLB_1: Q5.1 U4.15 | length 859.8
  Top Layer w20: Q5.1@3863,2784.84 v2(3903.49,2784.84)
  Mid-Layer 2 w15: v1(3162.74,2803.15) 3210.64,2851.05 3625.64,2851.05 3691.85,2784.84 v2(3903.49,2784.84)
  Bottom Layer w9: U4.15@3133.86,2808.9 3156.99,2808.9 v1(3162.74,2803.15)
GLC_1: Q4.1 U4.20 | length 1081.3
  Top Layer w20: Q4.1@3863,2472.64 v2(3903.49,2472.64)
  Mid-Layer 2 w15: v1(3104.98,2710.47) 3104.98,2631.44 3228.3,2508.13 3275.49,2508.13 3393.81,2389.81 3640.8,2389.81 3723.63,2472.64 v2(3903.49,2472.64)
  Bottom Layer w9: v1(3104.98,2710.47) U4.20@3133.86,2710.47
INHA_1: U3.29 U4.37 | length 429.7
  Top Layer w10: U3.29@2512.68,2429.53 2548.47,2429.53 2558.31,2439.37 2612.63,2439.37
  Bottom Layer w9: v1(2616.17,2448.96) 2635.66,2448.96 2710.75,2524.06 2730.35,2524.06 2838.03,2631.73 U4.37@2866.14,2631.73
INHB_1: U3.30 U4.39 | length 482.7
  Top Layer w10: U3.30@2512.68,2409.84 v1(2580,2409.84)
  Bottom Layer w9: v1(2580,2409.84) 2580,2445.69 2606.14,2471.84 2635.9,2471.84 2705.58,2541.51 2721.52,2541.51 2851.11,2671.1 U4.39@2866.14,2671.1
INHC_1: U3.31 U4.41 | length 549.2
  Top Layer w10: U3.31@2512.68,2390.16 v1@2553.15,2390.16
  Bottom Layer w9: v1(2555,2385) 2555,2450.3 2592.54,2487.84 2629.28,2487.84 2701.07,2559.63 2713.16,2559.63 2804.14,2650.61 2804.14,2692.4 2822.21,2710.47 U4.41@2866.14,2710.47
LED_GRE: RG-led1.4 U3.3 | length 716.1
  Top Layer w10: v1(2772.24,2355.63) 2772.24,2341.57 2782.71,2331.1 U3.3@2847.32,2331.1 ; v1(3255,2235.31) RG-led1.4@3255,2267
  Mid-Layer 1 w8: v1(2772.24,2355.63) 2956.88,2355.63 3014.01,2412.76 3096.24,2412.76 3255,2254 v1(3255,2235.31)
LED_RED: RG-led1.2 U3.2 | length 685.3
  Top Layer w10: v1(2768.72,2311.42) U3.2@2847.32,2311.42 ; v1(3225,2235.31) RG-led1.2@3225,2267
  Mid-Layer 1 w8: v1(2768.72,2311.42) 2793.72,2336.41 2958.88,2336.41 3020.23,2397.76 3089.24,2397.76 3225,2262 v1(3225,2235.31)
M1_HALL_A: J1.20 R1.2 R2.2 | length 828.6
  Top Layer w15: v1(3037.79,2289.84) 3046.63,2281 R2.2@3080,2281 R1.2@3138,2281
  Mid-Layer 1 w8: 2433.43,2259.84 2451.84,2259.84 2486.51,2294.51 2526.49,2294.51 2582.22,2238.78 2774.78,2238.78 2842,2306 3006,2306 3022.16,2289.84 v1(3037.79,2289.84)
  Mid-Layer 1 w15: J1.20@2385.04,2259.84 2433.43,2259.84
M1_HALL_A_OUT: C1.2 R2.1 U3.14 | length 550.9
  Top Layer w8: v1(2764.2,2498.43) 2768.58,2502.81 U3.14@2768.58,2567.32
  Top Layer w15: v1(3027.87,2260.3) 3046.54,2241.63 C1.2@3138,2241.63
  Mid-Layer 2 w10: v1(2764.2,2498.43) 3002.33,2260.3 v1(3027.87,2260.3)
M1_HALL_B: J1.18 R5.2 R6.2 | length 849.9
  Top Layer w15: v1(3049.82,2375) 3054.18,2379.37 R6.2@3080,2379.37 R5.2@3139,2379.37
  Mid-Layer 1 w8: 2433.43,2359.84 2482,2311.27 2530.94,2311.27 2588.43,2253.78 2766.78,2253.78 2834.41,2321.41 2965.09,2321.41 3018.68,2375 v1(3049.82,2375)
  Mid-Layer 1 w15: J1.18@2385.04,2359.84 2433.43,2359.84
M1_HALL_B_OUT: C2.2 R6.1 U3.15 | length 577.1
  Top Layer w8: v1(2726.71,2498.43) 2748.9,2520.61 U3.15@2748.9,2567.32
  Top Layer w15: v1(3049.82,2345) 3054.82,2340 R6.1@3080,2340 C2.2@3138,2340
  Mid-Layer 2 w10: v1(2726.71,2498.43) 2753.42,2525.13 2812.72,2525.13 2992.85,2345 v1(3049.82,2345)
MOS_TEMP1: C33.1 R31.2 TR1.1 U3.16 | length 2122.7
  Top Layer w8: v1(2700.31,2474.8) 2700.31,2503.8 2729.21,2532.7 U3.16@2729.21,2567.32
  Top Layer w10: v1(3049.82,2437.63) 3067.45,2420 C33.1@3141.63,2420 3141.63,2481.63 3156.08,2496.08 3208.05,2496.08 3220.23,2483.9 3220.23,2467.75 v1@3255.11,2432.87
  Top Layer w15: TR1.1@3843.37,2860.95 v2(3892,2860.95)
  Mid-Layer 1 w8: v1(2700.31,2474.8) 2700.31,2438.72 2758.22,2380.82 2831.68,2380.82 2888.49,2437.63 v1(3049.82,2437.63)
  Mid-Layer 1 w15: v1(3255.11,2431.96) 3415.72,2431.96 3604.7,2242.98 3699.97,2242.98 3721.14,2264.15 3721.14,2690.09 v2(3892,2860.95)
NetC11_2: C11.2 U1.4 | length 60
  Bottom Layer w10: U1.4@2558.98,2670 C11.2@2619,2670
NetC12_1: C12.1 C13.1 L1.1 U1.5 | length 130.6
  Bottom Layer w15: U1.5@2482.6,2671.57 C12.1@2482.6,2620 L1.1@2561.63,2620
NetC25_1: C25.1 U4.5 | length 117.7
  Bottom Layer w9: U4.5@2970.47,2873.86 2970.47,2895.47 2998.37,2923.37 C25.1@2998.37,2980
NetC26_1: C26.1 U4.3 | length 70.1
  Bottom Layer w9: C26.1@2921.63,2940 2921.63,2916.87 2931.1,2907.4 U4.3@2931.1,2873.86
NetC26_2: C26.2 U4.4 | length 70.4
  Bottom Layer w9: U4.4@2950.79,2873.86 2950.79,2905.77 2961,2915.99 C26.2@2961,2940
NetC28_1: C28.1 R17.2 | length 50.6
  Top Layer w15: C28.1@3621,2553.74 R17.2@3671.63,2553.74
NetC29_1: C29.1 R18.2 | length 50.6
  Top Layer w15: C29.1@3621,2865.94 R18.2@3671.63,2865.94
NetC30_1: C30.1 R19.2 | length 50.6
  Top Layer w15: C30.1@3621,3178.15 R19.2@3671.63,3178.15
NetC36_1: C36.1 D2.2 L2.1 U4.45 | length 217.1
  Bottom Layer w10: C36.1@2719,2725 2719,2752.7 L2.1@2761.02,2794.72
  Bottom Layer w35: L2.1@2761.02,2840 D2.2@2761.02,2970
NetC36_2: C36.2 U4.44 | length 123.6
  Bottom Layer w8: C36.2@2761,2725 2785.64,2725 2830.17,2769.53 U4.44@2866.14,2769.53
NetD1_1: D1.1 R40.1 | length 40.6
  Top Layer w10: R40.1@3158.37,2840 D1.1@3199,2840
NetR3_2: R3.2 U3.44 | length 137.8
  Top Layer w10: U3.44@2709.53,2232.68 2709.53,2268.47 v1(2719.37,2278.31)
  Bottom Layer w8: R3.2@2659,2240 2659,2260.29 2667.36,2268.65 2709.71,2268.65 v1(2719.37,2278.31)
NetR4_1: R4.1 RG-led1.3 | length 124.9
  Top Layer w10: RG-led1.3@3255,2333 v1(3255,2364.7)
  Bottom Layer w10: R4.1@3181,2340 3245.68,2340 3255,2349.32 v1(3255,2364.7)
NetR7_1: R7.1 RG-led1.1 | length 82
  Top Layer w10: RG-led1.1@3225,2333 v1(3225,2364.7)
  Bottom Layer w10: R7.1@3181,2380 3209.7,2380 v1(3225,2364.7)
NetR8_1: R8.1 U2.8 | length 80.3
  Top Layer w20: R8.1@2521,2620 2550.2,2620 2560,2629.8 U2.8@2560,2667
NetR26_1: R26.1 U4.38 U4.40 U4.42 | length 684.2
  Mid-Layer 2 w8: v1(2898,2680.94) 2934.46,2680.94 2944.7,2691.19 3039.46,2691.19 3082.93,2647.71 3082.93,2563.29 3030.88,2511.24 2987.69,2511.24 2979.86,2519.07 v1(2979.86,2533.89)
  Bottom Layer w9: U4.38@2866.14,2651.42 2891,2651.42 2898,2658.42 2898,2723.16 2891,2730.16 U4.42@2866.14,2730.16 ; U4.40@2866.14,2690.79 2898,2690.79
  Bottom Layer w10: v1(2979.86,2533.89) 2979.86,2520.36 2992.21,2508 3030,2508 3038,2500 R26.1@3041.63,2500
NetR35_2: R35.2 U4.34 | length 50.2
  Bottom Layer w9: U4.34@2931.1,2606.14 2931.1,2589.84 2941,2579.94 R35.2@2941,2560
NetR50_2: R50.2 U4.48 | length 231.5
  Mid-Layer 1 w10: v1(2838.43,2903.02) 2838.43,2928.06 2890.37,2980 v1(2914.15,2980)
  Bottom Layer w9: v1(2838.43,2903.02) 2838.43,2859.25 2849.41,2848.27 U4.48@2866.14,2848.27
  Bottom Layer w10: R50.2@2881,2980 v1(2914.15,2980)
NRST: C14.1 R9.2 U3.7 | length 227.4
  Top Layer w10: v1(2801.69,2405) 2806.53,2409.84 U3.7@2847.32,2409.84
  Bottom Layer w10: v1(2801.69,2405) 2828.83,2377.86 2889.72,2377.86 2901,2366.58 C14.1@2901,2340 R9.2@2939,2340